# Altium PCB ecen_5730_board4_10-11-2021.PcbDoc
Units mil, origin at the board's own origin, x right, y up, seen from the top; angles counter-clockwise.
Board outline 4100 x 2575 mil, 4 copper layers (Top Layer, Int1 (GND), Int2 (PWR), Bottom Layer), stack 43.712 mil thick; 40 components, 39 nets, 137 pads, 31 vias.
Unrouted connection lines stored in the file: 1.
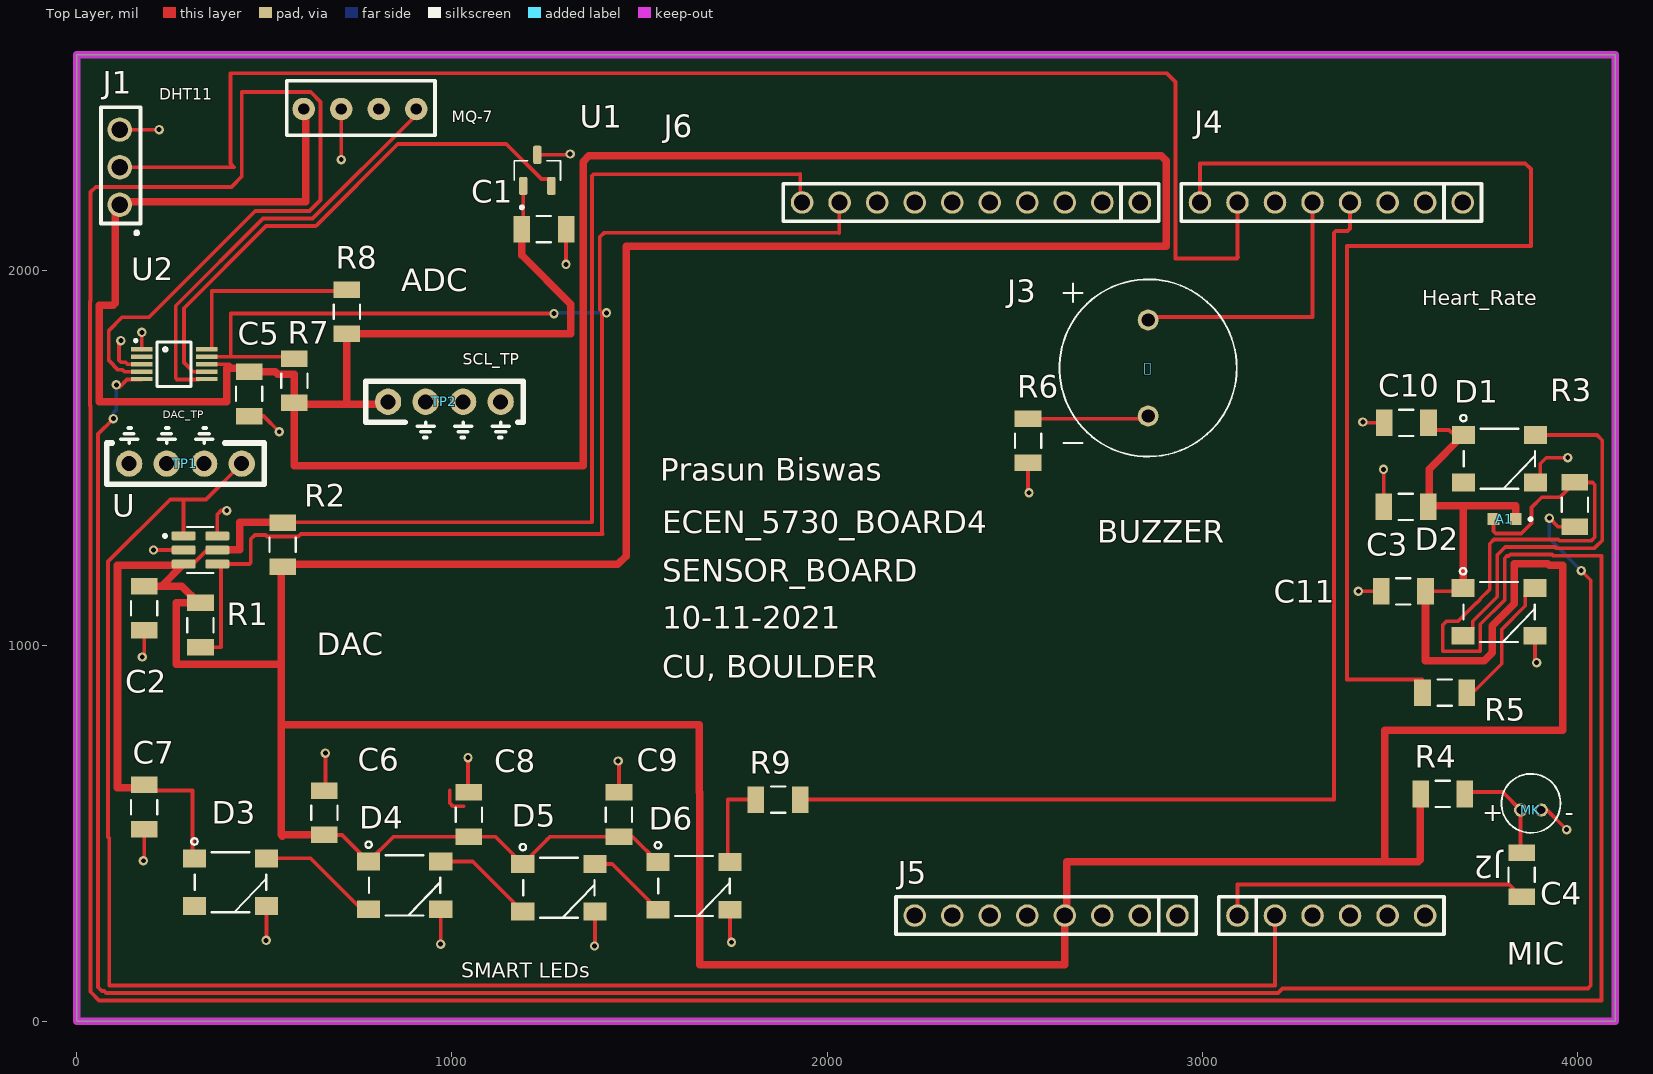
[diagram p0: Top Layer view]
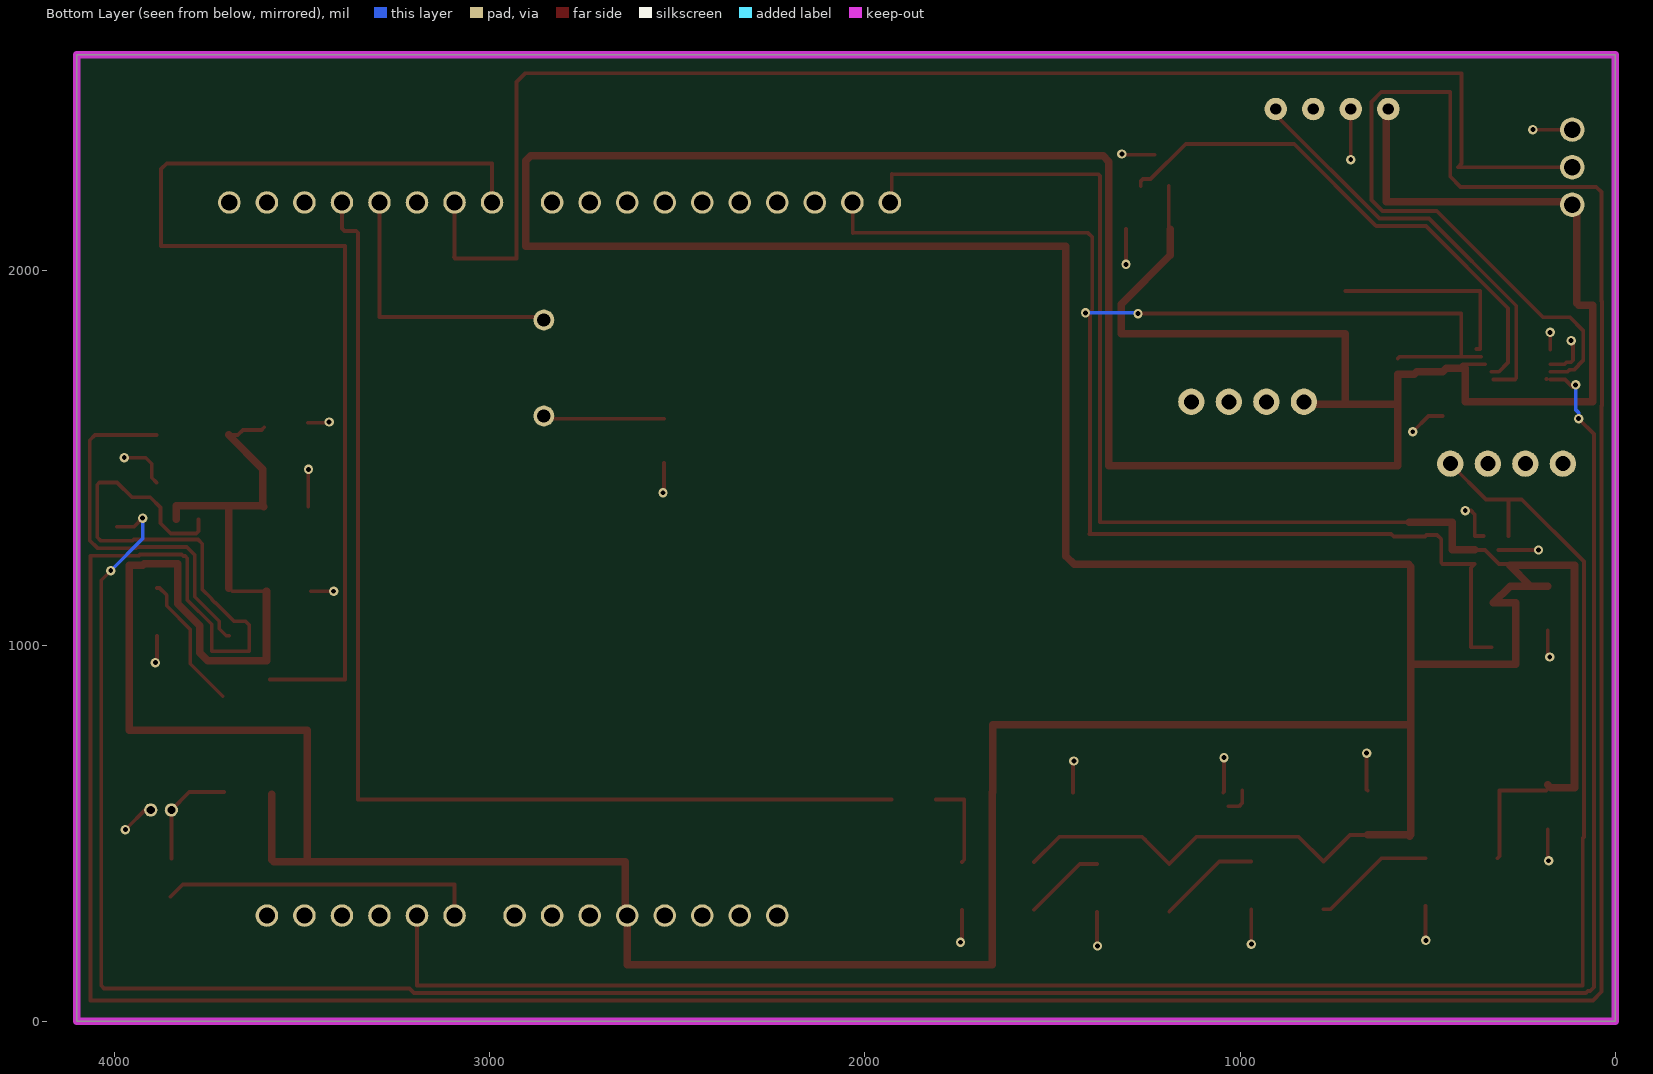
[diagram p1: Bottom Layer view, seen from below]
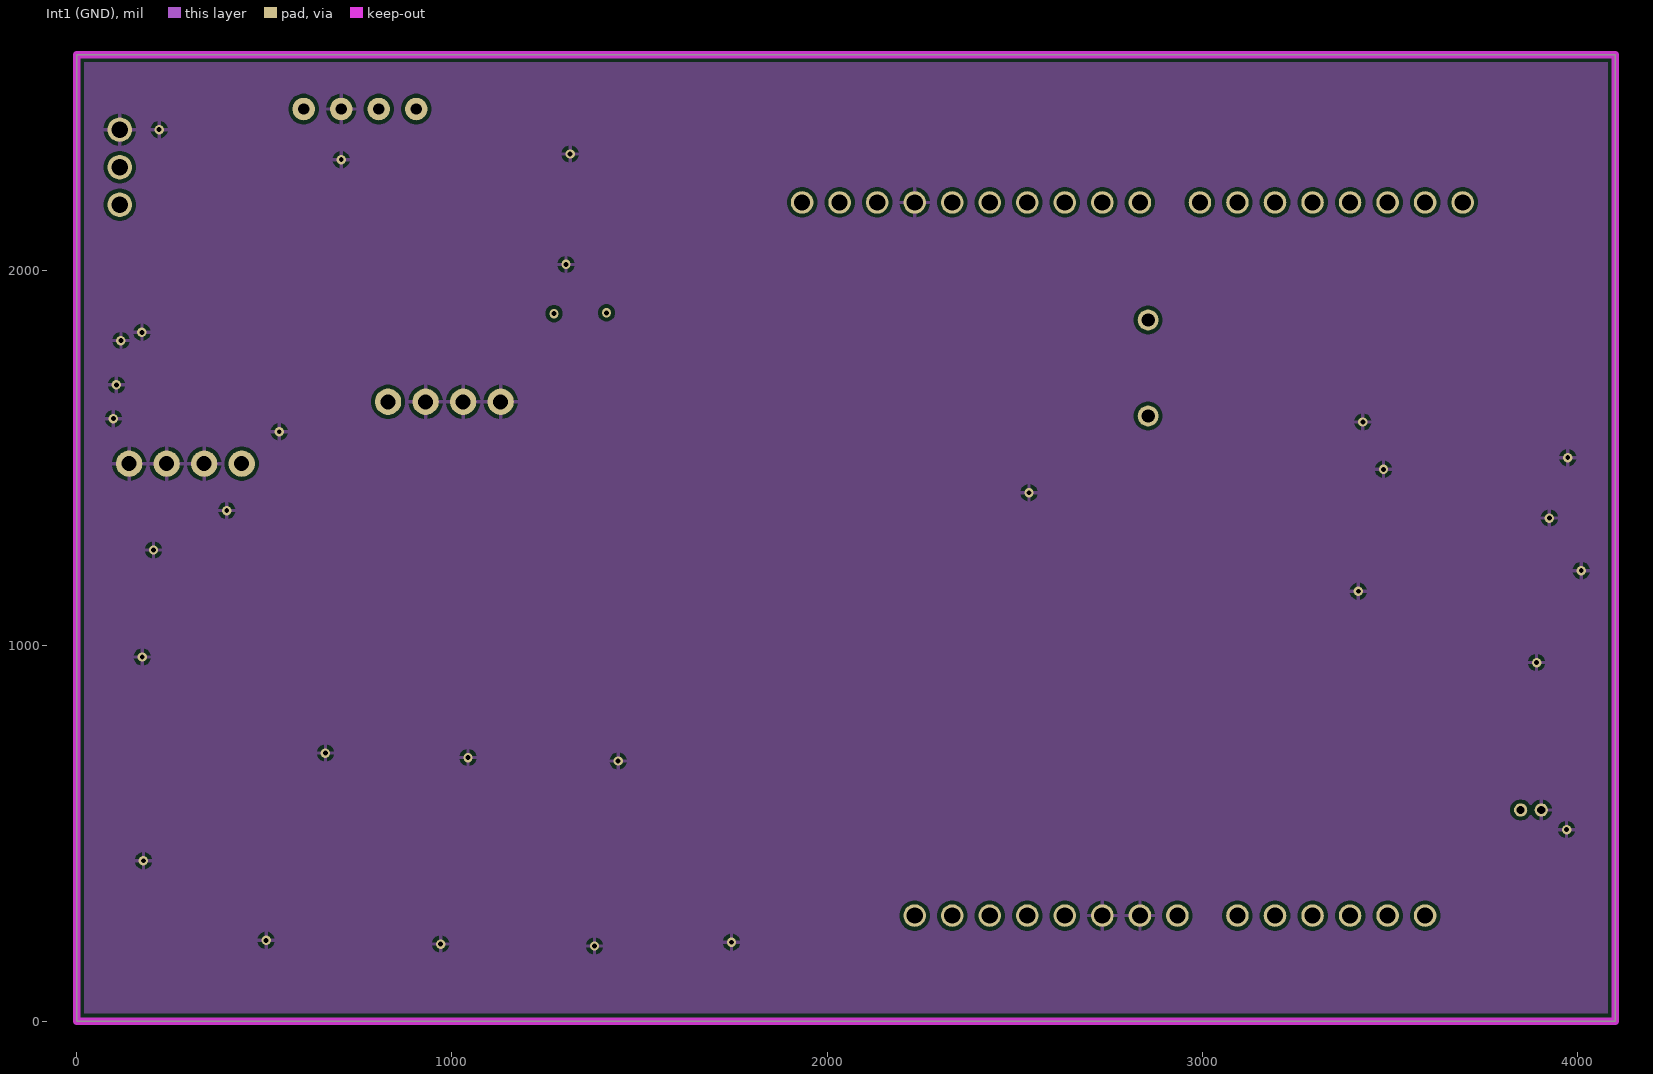
[diagram p2: Int1 (GND)]
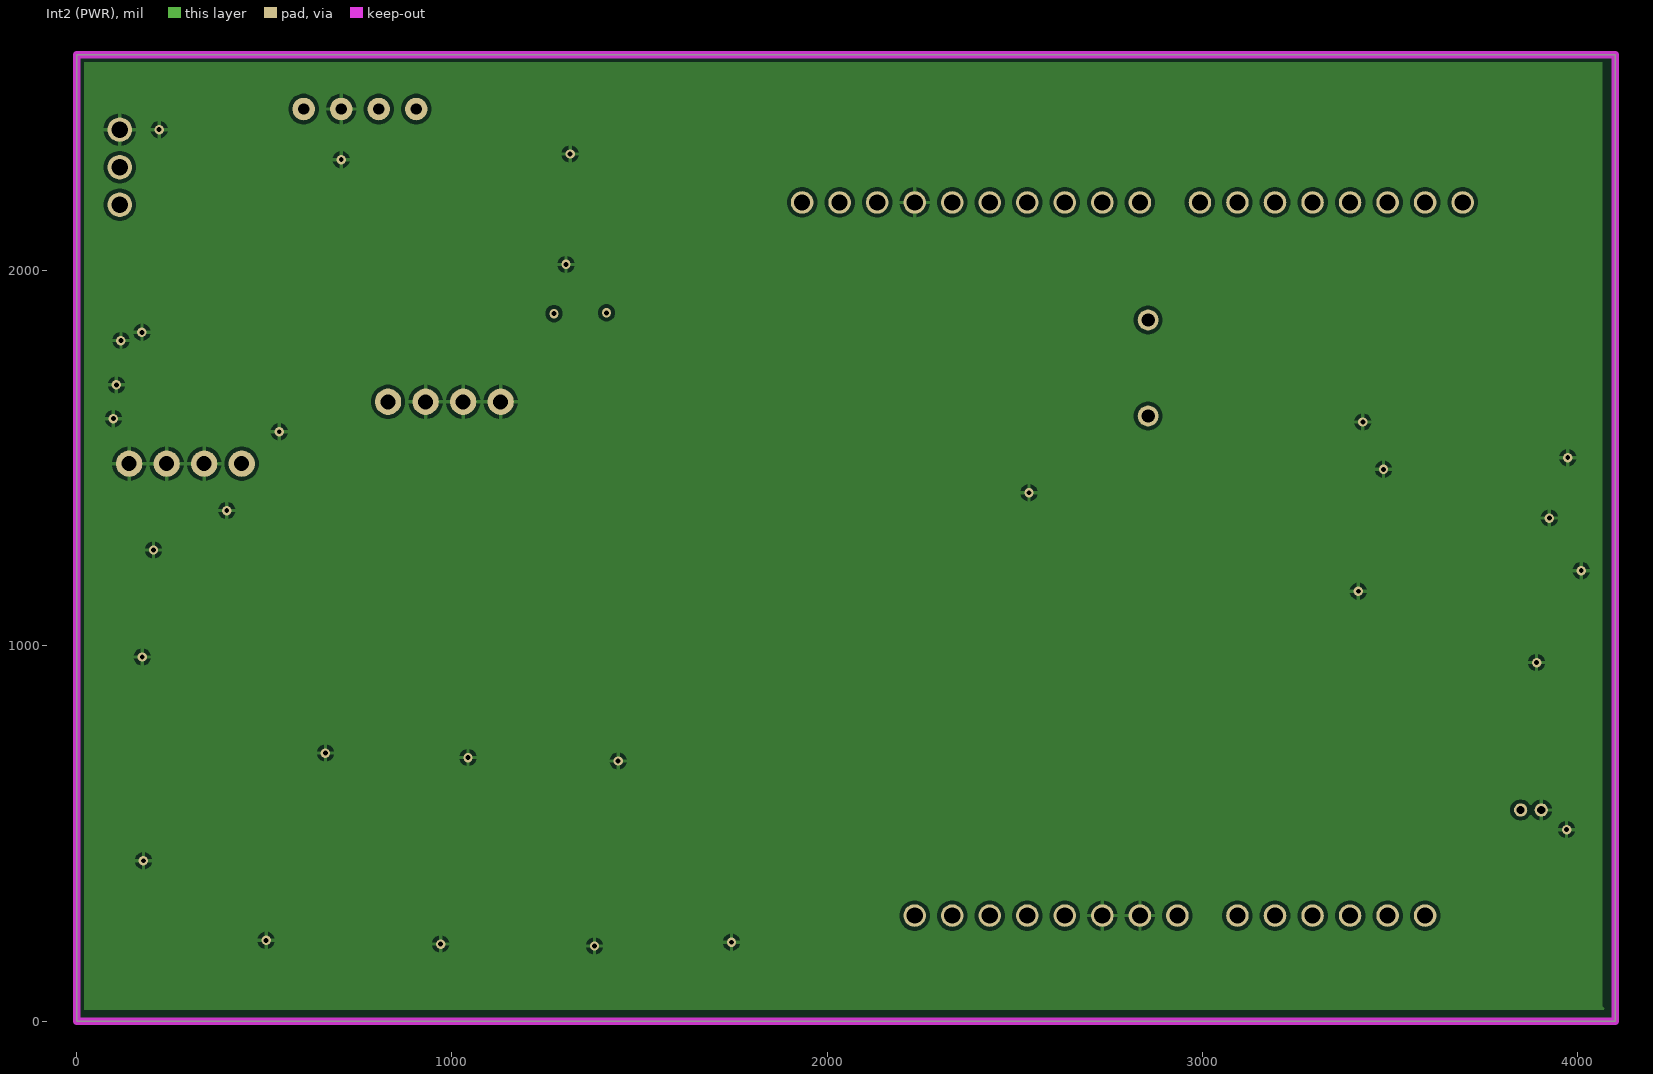
[diagram p3: Int2 (PWR)]
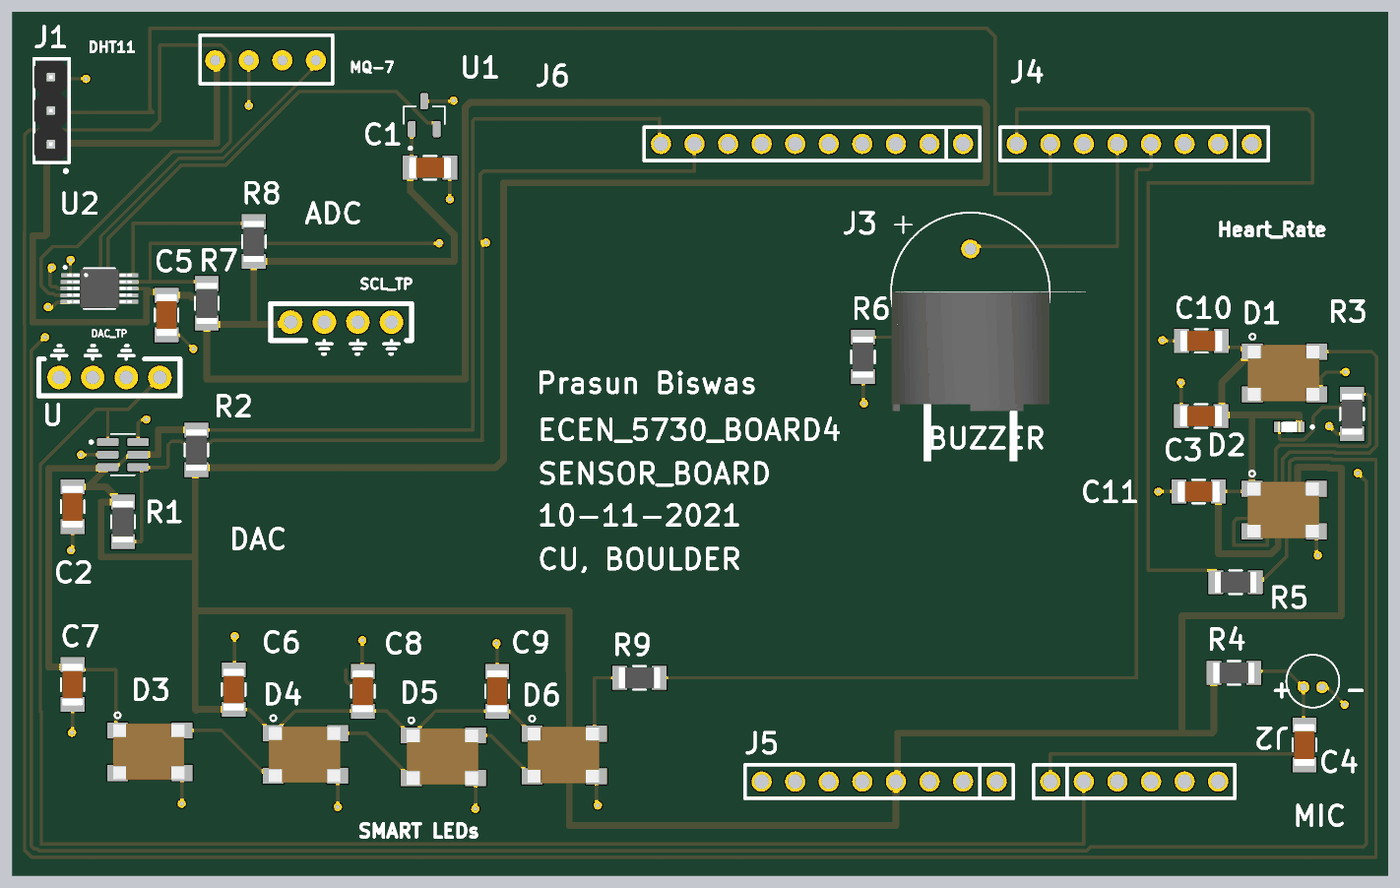
[diagram p4: 3D render of the assembled board from above, using the file's embedded part models]

## Layer stack, top to bottom
Top Solder: solder mask 1, SM-001, Dk 4
Top Layer: signal copper 1.378
Dielectric 2: prepreg 5.1, PP-017, Dk 4.3
Int1 (GND): signal copper 1.378
Dielectric 3: core 28, Core-039, Dk 4.8
Int2 (PWR): signal copper 1.378
Dielectric 4: prepreg 5.1, PP-017, Dk 4.3
Bottom Layer: signal copper 1.378
Bottom Solder: solder mask 1, SM-001, Dk 4

## Board outline
0,0 4100,0 4100,2575 0,2575

## Design rules (kind name [scope] priority, off if disabled: settings)
Clearance [All] p1: gap=10 ignorepadtopadclearanceinfootprint=FALSE except(0: Arc-Hole Track-Hole SMDPad-Hole THPad-Hole Via-Hole Fill-Hole Poly-Hole Region-Hole Text-Hole)
PolygonConnect [All] p1: connectstyle=Relief reliefconductorwidth=10 reliefentries=4 polygonreliefangle="90 Angle" airgapwidth=10
RoutingVias [All] p1: holewidth=13 width=25 viastyle="Through Hole" minholewidth=13 minwidth=25 maxholewidth=13 maxwidth=50
SolderMaskExpansion [All] p1: expansion=4 istentingtop=FALSE
Width "Schematic Width Constraint_1" [InNet('GND')] p1: maxlimit=100 minlimit=10 preferedwidth=20 midlayer1_maxwidth=10 midlayer1_prefwidth=10 midlayer2_maxwidth=10 midlayer2_prefwidth=10 minimp=50.000000 maximp=50.000000 favimp=50.000000
Width "Schematic Width Constraint" [InNet('5V')] p2: maxlimit=100 minlimit=10 preferedwidth=20 midlayer1_maxwidth=10 midlayer1_prefwidth=10 midlayer2_maxwidth=10 midlayer2_prefwidth=10 minimp=50.000000 maximp=50.000000 favimp=50.000000
Width [InNet('5V')] p3: maxlimit=30 minlimit=10 preferedwidth=20 midlayer1_maxwidth=10 midlayer1_prefwidth=10 midlayer2_maxwidth=10 midlayer2_prefwidth=10 minimp=50.000000 maximp=50.000000 favimp=50.000000
30 further rules are at their usual default settings.

## Components (designator, comment, footprint, x,y, rotation, side; value= is the part's Value field where it differs from the comment)
 "AT-1224-TWT-5V-2-R" XDCR_AT-1224-TWT-5V-2-R 2855,1740 r0 top
A1 "ALS-PT19-315C/L177/TR8" XDCR_ALS-PT19-315C/L177/TR8 3805,1337.24 r180 top
C1 "22uF" 1206_Passive_Capacitor 1245,2110 r0 top
C2 "22uF" 1206_Passive_Capacitor 180,1100 r270 top
C3 "22uF" 1206_Passive_Capacitor 3542,1370 r0 top
C4 "1uF" 1206_Passive_Capacitor 3850,390 r270 top
C5 "22uF" 1206_Passive_Capacitor 460,1671 r270 top
C6 "22uF" 1206_Passive_Capacitor 660,555 r90 top
C7 "22uF" 1206_Passive_Capacitor 180,570 r270 top
C8 "22uF" 1206_Passive_Capacitor 1045,550 r90 top
C9 "22uF" 1206_Passive_Capacitor 1445,550 r90 top
C10 "22uF" 1206_Passive_Capacitor 3543,1594 r0 top
C11 "22uF" 1206_Passive_Capacitor 3535,1145 r0 top
D1 "IN-PI55QATPRPGPBPW" SERIAL_LED 3791,1498 r0 top
D2 "IN-PI55QATPRPGPBPW" SERIAL_LED 3790,1090 r0 top
D3 "IN-PI55QATPRPGPBPW" SERIAL_LED 410,370 r0 top
D4 "IN-PI55QATPRPGPBPW" SERIAL_LED 874,361.5 r0 top
D5 "IN-PI55QATPRPGPBPW" SERIAL_LED 1285,355 r0 top
D6 "IN-PI55QATPRPGPBPW" SERIAL_LED 1645,360 r0 top
J1 "3 PIN" 3_PIN_100mil 115,2175 r90 top
J2 "MALE" 6_PIN_100MIL 3093,281 r0 top
J3 "MALE 10PIN" 10_PIN_100MIL 2833,2181 r180 top value=MALE
J4 "MALE 8PIN" 8_PIN_100MIL 3693,2181 r180 top value=MALE
J5 "MALE 8PIN" 8_PIN_100MIL 2933,281 r180 top value=MALE
J6 "4-pin header" 4pinheader 755,2430 r90 top
MK "CMEJ-0415-42-P" MIC_CMEJ-0415-42-P 3875,580 r0 top
R1 "1k" 1206_Passive_Resitor 330,1055 r270 top value="1K Ohm"
R2 "1k" 1206_Passive_Resitor 549,1269 r90 top value="1K Ohm"
R3 "10k" 1206_Passive_Resitor 3992,1376 r90 top value=10KOhm
R4 "1k" 1206_Passive_Resitor 3640,605 r180 top value="1K Ohm"
R5 "1k" 1206_Passive_Resitor 3645,875 r180 top value="1K Ohm"
R6 "1k" 1206_Passive_Resitor 2535,1546 r270 top value="1K Ohm"
R7 "1k" 1206_Passive_Resitor 580,1706 r270 top value="1K Ohm"
R8 "1k" 1206_Passive_Resitor 720,1890 r270 top value="1K Ohm"
R9 "1k" 1206_Passive_Resitor 1869,590 r0 top value="1K Ohm"
TP1 "10x Probe TP" TP10x_Probe 290,1485 r180 top
TP2 "10x Probe TP" TP10x_Probe 980,1650 r0 top
U "MCP4725A0T-E/CH" SOT95P270X145-6N 330,1255.08 r0 top
U1 "DRV5053RAQDBZT" SOT95P237X112-3N 1227.6,2266.54 r90 top
U2 "ADS1115IDGSR" ADC_ADS1115IDGSR 260,1750 r0 top

## Footprints (in the part's own frame and the unit in brackets; to place one, negate y for a bottom-side part, rotate by r counter-clockwise, add the part's x,y. Pads: shape width x height; smd on the part's side, far side on the other; paste and mask are expansions set on the pad)
3_PIN_100mil [mm]
  round 1.65 hole 1.1: 1(0,0) 2(2.54,0) 3(5.08,0)
  silkscreen extent -2,-1.4 6.6,1.27, body extent -1.14,-1.27 6.48,1.27, height 8.38
4pinheader [mil]
  round 60 hole 30: 1(0,150) 1(0,150) 2(0,50) 3(0,-50) 4(0,-150)
  silkscreen extent -70,-200 75,195
6_PIN_100MIL [mil]
  round 60 hole 43.31: 1(0,0) 2(100,0) 3(200,0) 4(300,0) 5(400,0) 6(500,0)
  silkscreen extent -50,-50 550,50
8_PIN_100MIL [mil]
  round 60 hole 43.31: 1(0,0) 2(100,0) 3(200,0) 4(300,0) 5(400,0) 6(500,0) 7(600,0) 8(700,0)
  silkscreen extent -50,-50 750,50
10_PIN_100MIL [mil]
  round 60 hole 43.31: 1(0,0) 2(100,0) 3(200,0) 4(300,0) 5(400,0) 6(500,0) 7(600,0) 8(700,0) 9(800,0) 10(900,0)
  silkscreen extent -50,-50 950,50
1206_Passive_Capacitor [mil]
  rect 44x71 smd: 1(-59,0) 2(59,0)
  silkscreen extent -19,-35 19,35, body extent -63,-31 63,32, height 50
1206_Passive_Resitor [mil]
  rect 44x71 smd: 1(-59,0) 2(59,0)
  silkscreen extent -19,-35 19,35, body extent -61,-31 61,31, height 26
ADC_ADS1115IDGSR [mm] "*SOP50P490X110-10N"
  rect 1.45x0.3 smd mask+0.025: 1(-2.2,1)
  rect 1.47x0.3 smd mask+0.025: 2(-2.2,0.5) 3(-2.2,0) 4(-2.2,-0.5) 5(-2.2,-1) 6(2.2,-1) 7(2.2,-0.5) 8(2.2,0) 9(2.2,0.5) 10(2.2,1)
  silkscreen extent -2.68,-1.5 1.15,1.68, body extent -2.44,-1.49 2.46,1.51, height 1.1
MIC_CMEJ-0415-42-P [mm]
  round 0.9 hole 0.55: N(0.7,-0.45) P(-0.7,-0.45)
  silkscreen extent -2,-2 2,2
SERIAL_LED [mil] "Footprint for serial LED"
  rect 62x47.5 smd: 1(-96,63.5) 2(-96,-63.5) 3(96,-63.5) 4(96,63.5)
  silkscreen extent -105,-80 95,117, body extent -109,-84 103,84, height 63
SOT95P237X112-3N [mm]
  rrect50% 1.24x0.59 smd: 1(-1.055,0.95) 2(-1.055,-0.95) 3(1.055,0)
  silkscreen extent -2.6,-1.56 0.65,1.56
SOT95P270X145-6N [mm]
  rrect25% 1.61x0.59 smd: 1(-1.145,0.95) 2(-1.145,0) 3(-1.145,-0.95) 4(1.145,-0.95) 5(1.145,0) 6(1.145,0.95)
  silkscreen extent -2.5,-1.56 0.9,1.56
TP10x_Probe [mil] "Small Probs footprint"
  round 70 hole 40: 1(-150,0) 2(-50,0) 2(50,0) 2(150,0)
  silkscreen extent -210,-95 210,55
XDCR_ALS-PT19-315C/L177/TR8 [mm]
  rect 0.8x0.8 smd: 1(-0.75,0) 2(0.75,0)
  silkscreen extent -1.85,-0.1 -1.65,0.1, body extent -0.85,-0.4 0.85,0.4, height 0.6
XDCR_AT-1224-TWT-5V-2-R [mm]
  round 1.408 hole 0.9: N(0,-3.25) P(0,3.25)
  silkscreen extent -6,-6 6,6, body extent -6,-12.8 8.75,0.05, height 6

## Part data
: "AUDIO TRANSDUCER 5 VP-P 87 DB 2400 HZ", Package="PUI Audio,", Availability="In Stock", Check_prices=https://www.snapeda.com/parts/AT-1224-TWT-5V-2-R/PUI%20Audio,%20Inc./view-part/453710/?ref=eda, MF="PUI Audio,", MP=AT-1224-TWT-5V-2-R, Price=None, Purchase-URL=https://pricing.snapeda.com/search/part/AT-1224-TWT-5V-2-R/?ref=eda, SnapEDA_Link=https://www.snapeda.com/parts/AT-1224-TWT-5V-2-R/PUI%20Audio,%20Inc./view-part/453710/?ref=snap
A1: "Phototransistors 630nm 2-SMD, No Lead", Package=None, Availability=Good, Check_prices=https://www.snapeda.com/parts/ALS-PT19-315C/L177/TR8/Everlight%20Electronics%20Co%20Ltd/view-part/226235/?ref=eda, MF=Everlight, MP=ALS-PT19-315C/L177/TR8, Price=None, Purchase-URL=https://pricing.snapeda.com/search/part/ALS-PT19-315C/L177/TR8/?ref=eda, SnapEDA_Link=https://www.snapeda.com/parts/ALS-PT19-315C/L177/TR8/Everlight%20Electronics%20Co%20Ltd/view-part/226235/?ref=snap
C1 C2 C3 C5 C6 C7 C8 C9 C10 C11: library part C_22uF_1206, "22uF ±10% 25V X5R 1206 Multilayer Ceramic Capacitors MLCC - SMD/SMT RoHS", LCSC Part#=C12891, MFR Part #=CL31A226KAHNNNE, Datasheet=https://datasheet.lcsc.com/lcsc/1811031514_Samsung-Electro-Mechanics-CL31A226KAHNNNE_C12891.pdf, Type=Extended
C4: library part C_1uF_1206, "MULTILAYER CERAMIC CAPACITORS MLCC - SMD/SMT 1UF 50V 1206 ROHS", LCSC Part#=C1848, MFR Part #=CL31B105KBHNNNE, Digikey Link=https://www.digikey.com/product-detail/en/C1206C105M4RACTU/399-8150-1-ND/3471873/?itemSeq=304982366, Digikey Part=399-8150-1-ND, Type=Basic
D1 D2 D3 D4 D5 D6: library part LED_Smart_5050, "Digital Series Cascade LED", DigiKey=https://www.digikey.com/product-detail/en/inolux/IN-PI55QATPRPGPBPW-60/1830-1209-1-ND/9681289
J1: library part J_3_PIN_HEADER, "3 2.54mm Straight 1 Header，Breakaway Through Hole Pin Header & Female Header ROHS", LCSC Part#=C49257, Datasheet=https://datasheet.lcsc.com/lcsc/1811132313_BOOMELE-Boom-Precision-Elec-C49257_C49257.pdf, MFR Part #=C49257, Type=Extended
J2: library part JF_6_PIN_MALE, "Male header- 6 pin 1 row- through Hole", LCSC Part#=C37208, Datasheet=https://datasheet.lcsc.com/szlcsc/1810312320_BOOMELE-Boom-Precision-Elec-C37208_C37208.pdf, Type=Extended
J3: library part JF_10_PIN_MALE, "Pin Header 10 1 right-angle，180degrees 2.54mm Through Hole,P=2.54mm Pin Header & Female Header RoHS", LCSC Part#=C124372, Datasheet=https://datasheet.lcsc.com/szlcsc/1810241611_Ckmtw-Shenzhen-Cankemeng-C124372_C124372.pdf, Type=Extended
J4 J5: library part JF_8_PIN_MALE, "Pin Header 8 1 right-angle，180degrees 2.54mm Through Hole,P=2.54mm Pin Header & Female Header RoHS", LCSC Part#=C492407, Datasheet=https://datasheet.lcsc.com/szlcsc/2003191006_XFCN-PZ254V-11-08P_C492407.pdf, Type=Extended
J6: library part J
MK: "4.0 Ð¼Ð¼, Ð²ÑÐµÐ½Ð°Ð¿Ñ€Ð°Ð²Ð»ÐµÐ½Ð½Ñ‹Ð¹, Ð¼Ð¾Ð½Ñ‚Ð°Ð¶ Ð½Ð° Ð¿ÐµÑ‡Ð°Ñ‚Ð½Ð¾Ð¹ Ð¿Ð»Ð°Ñ‚Ðµ, 2.0 Ð’ Ð¿Ð¾ÑÑ‚Ð¾ÑÐ½Ð½Ð¾Ð³Ð¾ Ñ‚Ð¾ÐºÐ°, Ð­Ð»ÐµÐºÑ€ÐµÑ‚-ÐºÐ¾Ð½Ð´ÐµÐ½ÑÐ°Ñ‚Ð¾Ñ€Ð½Ñ‹Ð¹ Ð¼Ð¸ÐºÑ€Ð¾Ñ„Ð¾Ð½", Package="CUI Inc.", CUI_purchase_URL=https://www.cuidevices.com/product/audio/microphones/electret-condenser-microphones/cmej-0415-42-p?utm_source=snapeda.com&utm_medium=referral&utm_campaign=snapedaBOM, Digi-Key_Part_Number=102-6542-ND, Digi-Key_Purchase_URL=https://www.digikey.com/product-detail/en/cui-devices/CMEJ-0415-42-P/102-6542-ND/10253451?utm_source=snapeda&utm_medium=aggregator&utm_campaign=symbol, MF="CUI Devices", MP=CMEJ-0415-42-P, SnapEDA_Link=https://www.snapeda.com/parts/CMEJ-0415-42-P/CUI%20Devices/view-part/3625885/?ref=snap
R1 R2 R4 R5 R6 R7 R8 R9: library part R_1K_1206, "CHIP RESISTOR - SURFACE MOUNT 1KOHMS ±1% 1/4W 1206 ROHS", LCSC Part#=C4410, MFR Part #=1206W4F1001T5, Digikey Link=https://www.digikey.com/product-detail/en/RNCP1206FTD1K00/RNCP1206FTD1K00CT-ND/2240675/?itemSeq=304982373, Digikey Part=RNCP1206FTD1K00CT-ND, Type=Basic
R3: library part R_10KOhm_1206, "10 kOhms ±5% 0.25W, 1/4W Chip Resistor 1206 (3216 Metric) Automotive AEC-Q200 Thick Film", LCSC Part#=C17902, Digikey Link=https://www.digikey.com/product-detail/en/RMCF1206JT300R/RMCF1206JT300RCT-ND/1942776/?itemSeq=304982374, Digikey Part=RMCF1206JT300RCT-ND, Type=Basic
TP1 TP2: library part TP_10x_Probe, "Test Point 300 mil centers"
U: "12 Bit Digital to Analog Converter 1 SOT-23-6", Package="SOT-23-6 Microchip", Availability=Unavailable, MF=Microchip, MP=MCP4725A0T-E/CH, Price=None, SnapEDA_Link=https://www.snapeda.com/parts/MCP4725A0T-E/CH/Microchip/view-part/109888/?ref=snap
U1: "SENSOR LINEAR ANALOG SOT23-3", Package=None, Availability=Unavailable, MP=DRV5053RAQDBZT, Price=None
U2: library part U_ADC_ADS1115IDGSR, "16-Bit ADC with Integrated MUX, PGA, Comparator, Oscillator, and Reference 10-VSSOP -40 to 125", LCSC Part#=C37593, Package="MSOP-10 Texas Instruments", Digi-Key_Purchase_URL=https://www.digikey.com/product-detail/en/texas-instruments/ADS1115IDGSR/296-38849-1-ND/5142969?utm_source=snapeda&utm_medium=aggregator&utm_campaign=symbol, MFR Part #=ADS1115IDGSR, SnapEDA_Link=https://www.snapeda.com/parts/ADS1115IDGSR/Texas%20Instruments/view-part/?ref=snap, Type=Extended

## Via types
v1: diameter 25, hole 13, Top Layer to Bottom Layer, 31 vias

## Nets (pads, with @x,y where several pads share a name; then routed paths per layer and width w, separated by ;. In a path a pad name is that pad's centre, name@x,y a point inside that pad or via, vN(x,y) a via of type N, cw(c..) or ccw(c..) an arc to the next point about the centre after c; other vN are vias at no path point)
3.3V: J5.5
5V: A1.1 C1.1 C2.1 C3.2 C5.1 C6.1 C7.1 C8.1 C9.1 C10.2 C11.2 D1.1 D2.1 D3.1 D4.1 D5.1 D6.1 J1.1 J3.10 J5.4 J6.1 R1.1 R2.1 R2.2 R4.2 R7.2 R8.2 TP2.1 U1.1 U2.8 U.3 U.5 | length 23943.7
  Top Layer w10: 98,1907 103,1912 ; C7.1@185,614 308.5,614 308.5,439 D3.1 ; U.3@281.24,1214 U.3 310.34,1217.68 347.66,1255 360,1255 360.08,1255.08 U.5 ; U2.8 349.4,1750 349.72,1749.69 405,1749.69 ; R2.1@545,1211 R2.1@550.53,1216.53 ; R2.2@549,1329 1373,1329 1373,2251.78 1377.11,2255.89 1926.89,2255.89 1928,2257 1928,2186 J3.10 ; R7.2 R7.2@583.5,1643.5 ; C6.1 707,496 D4.1 844,491 C8.1 1116.5,491 D5.1 1252,481.5 1252,482 1261,491 C9.1 1481.5,491 D6.1 ; TP2.1@823.5,1643.5 TP2.1 ; 994.5,614 994.5,580.79 1003.29,572 1030.86,572 ; C1.1 1190.2,2114.2 U1.1 ; 1659,609 1660,610 ; 3575,425 3580,430 ; R4.2@3580,604 R4.2 ; C11.2 3685.5,1145 D2.1 ; C10.2@3600,1582 3607,1575 3657,1575 3670.5,1561.5 D1.1
  Top Layer w20: 98,1907 61,1907 61,1650 400,1650 400,1739 ; 103,1912 103,2163 J1.1 123,2183 610,2183 610,2425 J6.1@605,2430 ; C7.1 172.92,621.92 109,621.92 109,1214 281.24,1214 226.24,1159 ; C2.1 226.24,1159 ; U.5 435,1255.08 435,1329 R2.2@549,1329 ; 405,1744 400,1739 ; R2.1@545,1211 545,950 ; R2.1@550.53,1216.53 1441.53,1216.53 1464,1239 1464,2065 2903,2065 2903,2292 2890,2305 1365,2305 1350,2290 1350,1480 580,1480 R7.2 580,1723 536.22,1723 529.22,1730 C5.1 451,1739 400,1739 ; R7.2@583.5,1643.5 720,1643.5 ; C6.1 551,496 548,493 545,496 545,790 ; TP2.1@823.5,1643.5 720,1643.5 ; C1.1 1186,2041 1317,1910 1317,1831 R8.2 720,1643.5 ; 1659,609 1659,790 545,790 ; 1660,610 1660,150 2633,150 J5.4 2638,286 2638,425 3485,425 ; 3575,425 3485,425 ; 3580,430 R4.2@3580,604 ; C11.2 3594,960 3750.36,960 3772,981.64 3772,1053.72 3830,1111.72 3830,1218 3920.36,1218 3923.36,1215 3960,1215 3960,775 3485,775 3485,425 ; C3.2 C3.2@3603.99,1372.99 ; D2.1 3694,1372.99 ; D1.1 3603.99,1470.49 C3.2@3603.99,1372.99 ; A1.1 3834.53,1372.99 3694,1372.99 ; 226.24,1159 280,1159 325,1114 265,1114 265,950 545,950 ; 545,790 545,950 ; C3.2@3603.99,1372.99 3694,1372.99
A0: C4.2 J2.1 | length 853.7
  Top Layer w10: J2.1 3093,364 3817,364 C4.2
A1: J2.2 TP1.1 U.1 | length 4984
  Top Layer w10: U.1 284.92,1389.92 ; TP1.1 344.92,1389.92 284.92,1389.92 ; J2.2 3193,95 87,95 87,487.64 84,490.64 84,1224.36 249.57,1389.92 284.92,1389.92
A2: J2.3
A3: J2.4
A4: J2.5
A5: J2.6
ADC_A2: A1.2 R3.2 U2.4 | length 11179.7
  Top Layer w10: U2.4@173.39,1730 127.57,1730 122.57,1735 110.57,1735 86,1759.57 86,1840.14 120.86,1875 193,1875 476,2158 620.36,2158 650,2187.64 650,2448.64 623.64,2475 440,2475 440,2250 412.48,2222.48 50.86,2222.48 37,2208.62 37,1918.36 36,1917.36 36,1639.64 37,1638.64 37,78 60,55 4063,55 4063,1240 3933.72,1240 3930.72,1243 3819.64,1243 3815.64,1239 3810.86,1239 3805,1233.14 3805,1122.07 3740,1057.07 3740,985 3640,985 3640,1055 3650,1065 3659.75,1065 3660,1065.25 3680.5,1065.25 3730,1114.75 3731.21,1114.75 3740,1123.54 3740,1125 3765,1150 3765,1271.43 3776.57,1283 3947.29,1283 3950.29,1280 4036.14,1280 4045,1288.86 4045,1429 4039,1435 R3.2 3952.75,1395.75 3903.89,1395.75 3876.45,1368.3 3876.45,1326.45 3849,1299 3781.33,1299 3775.47,1304.86 A1.2
ADC_A4: J6.4 U2.6 | length 1122.4
  Top Layer w10: U2.6@325,1709.41 267.59,1709.41 264,1713 264,1905.57 496.43,2138 628.64,2138 895.43,2404.79 895.43,2420.43 J6.4
ADC_A5: U1.2 U2.7 | length 1412.6
  Top Layer w10: U2.7@330,1730 310.56,1730 286,1754.56 286,1899.28 504.72,2118 636.92,2118 638.92,2120 855.92,2337 1144.85,2337 1238.39,2243.46 1258.45,2243.46 1265,2236.91 U1.2
D0: J4.1
D1: J4.2
D2: J4.3
D5: J4.6
D8: J3.1
D9: J3.2
D10: J3.3
D11: J3.4
D12: J3.5
D13: J3.6
DHT11: J1.2 J4.7 | length 3871.7
  Top Layer w10: J1.2 420,2275 410,2285 410,2525 2905,2525 2928,2502 2928,2032 3092,2032 3095,2035 3093,2037 J4.7
GND: C1.2 C2.2 C3.1 C5.2 C6.2 C7.2 C8.2 C9.2 C10.1 C11.1 D1.3 D2.3 D3.3 D4.3 D5.3 D6.3 J1.3 J3.7 J5.2 J5.3 J6.2 MK.N R3.1 R6.2 TP1.2 TP2.2 U1.3 U2.1 U2.3 U2.5 U.2 U.6 | length 9367.9
  Top Layer w10: v1(98,1605) 57,1564 57,90 67,80 73.72,80 78.72,75 3201.28,75 3213,86.72 4026.72,86.72 4034.37,94.37 4034.37,1174.63 v1(4009,1200) ; v1(106,1695) 106,1691 103.75,1688.75 114.1,1688.75 134.35,1709 U2.5@173,1709 ; J1.3 v1(220,2375) ; v1(118,1813) 113,1808 113,1760.86 118.86,1755 130.85,1755 135.85,1750 U2.3 ; U2.1 v1@173.39,1834.39 ; v1(175,970) 180,975 C2.2 ; v1(178,427) 180,429 C7.2 ; U2.5@182.8,1710.04 U2.5@183.39,1710.63 ; v1(205,1255) 205.08,1255.08 U.2 U.2@312.26,1255.08 ; U.6@350.79,1292.48 U.6 375.08,1350.08 385,1360 v1(400,1360) ; C5.2 498,1612 v1(540,1570) ; D3.3 506,224 v1@510,220 ; C6.2 663,617 v1(663,714) ; v1(705,2295) J6.2 ; v1(970,205) D4.3 ; v1(1043,702) 1043,611 C8.2 ; U1.3 1313.08,2308.08 v1(1315,2310) ; C1.2 v1(1304,2016) v1@1305,2015 ; v1(1380,200) 1381,201 D5.3 ; v1(1443,693) 1445,691 C9.2 ; D6.3 1741,214 v1(1745,210) ; R6.2 2535,1410 v1(2537.5,1407.5) v1@2540,1405 ; v1(3415,1145) C11.1 ; v1(3427,1596) 3429,1594 C10.1 ; v1(3482,1470) 3483,1469 C3.1 ; D2.3 3886,959 v1(3890,955) ; D1.3 3899.78,1447.28 3899.78,1485 3915.78,1501 v1(3973,1501) ; MK.N 3917.72,562.28 v1@3965,515 ; v1(3924,1340) 3947,1317 R3.1
  Bottom Layer w10: v1(98,1605) 98,1621 106,1629 v1(106,1695) ; v1(3924,1340) 3924,1285 v1(4009,1200)
  other v1: 505,215 3970,510 174,1835
Heart_LED: J4.8 R5.2 | length 3042.2
  Top Layer w10: J4.8 2993,2263 2993,2285 3035,2285 3860,2285 3875,2270 3875,2065 3385,2065 3385,910 R5.2@3585,910
IOREF: J5.7
Net_N: .N R6.1 | length 341.2
  Top Layer w10: R6.1 .N@2855,1605 ; .N@2855,1610 .N@2870,1625
NetC4_1: C4.1 MK.P R4.1 | length 289.5
  Top Layer w10: R4.1@3707.43,610 3799.72,610 MK.P C4.1@3847.44,432.56
NetD1_4: D1.4 D2.2 | length 1006.1
  Top Layer w10: D2.2 3701.25,1026.5 3720,1045.25 3720,1065.36 3785,1130.36 3785,1241.43 3806.57,1263 3939,1263 3942,1260 4044.43,1260 4065,1280.57 4065,1547.22 4050.72,1561.5 D1.4
NetD2_4: D2.4 R5.1 | length 364.9
  Top Layer w10: R5.1@3710.55,865.55 3797,952 3797,1043.36 3860,1106.36 3860,1134.75 3878.75,1153.5 D2.4
NetD3_4: D3.4 D4.2 | length 328.1
  Top Layer w10: D3.4 623.5,433.5 759,298 D4.2
NetD4_4: D4.4 D5.2 | length 274.3
  Top Layer w10: D4.4 1055.5,425 D5.2
NetD5_4: D5.4 D6.2 | length 218.5
  Top Layer w10: D5.4 1427,418.5 D6.2
NetD6_4: D6.4 R9.1 | length 244
  Top Layer w10: D6.4 1735,429.5 1735,590 R9.1
NetR8_1: R8.1 U2.10 | length 524.4
  Top Layer w10: U2.10@370,1790.59 360,1790.59 360,1945 R8.1@720,1945
PWM: .P J4.5 | length 728.1
  Top Layer w10: .P@2870,1875.91 3293,1875.91 J4.5
RESET: J5.6
S-LED: J4.4 R9.2 | length 3049.3
  Top Layer w10: R9.2 3350,590 3350,2100.14 3354.86,2105 3386.47,2105 3393,2111.53 3393,2147 J4.4
SDA: J3.9 R1.2 R7.1 U2.9 U.4 | length 4254.3
  Top Layer w10: R1.2 385,996 385,1207.76 U.4 460.68,1217.68 464,1221 464,1284 475,1295 503.29,1295 507.29,1291 590.71,1291 597.71,1298 1401.88,1298 1400,1299.88 1400,1885 v1@1402,1887 ; U2.9@358,1769.69 411,1769.69 ; R7.1 575.32,1769.69 411,1769.69 ; v1(1272,1885) 411,1885 411,1769.69 ; v1(1412,1887) v1@1402,1887 ; J3.9 2032,2180 2032,2099 2031,2100 1405,2100 1394,2089 1394,1895 v1@1402,1887
  Bottom Layer w10: v1(1272,1885) 1275,1888 1276,1887 v1(1412,1887)
Vin: J5.1
pads on no net: D1.2 D3.2 J3.8 J5.8 J6.3 U2.2

## Polygon pours and split planes (outlines as drawn)
GND on Int1 (GND) "GND_L02_P000" (solid, pour order 0): 10,2565 4080,2565 4080,20 10,20 10,2570 15,2575
GND on Int2 (PWR) "GND_L03_P001" (solid, pour order 1): 15,2555 4065,2555 4065,40 4075,30 15,30 15,2545 20,2550

## Keep-outs
Keep-Out Layer:
  the board outline again, w20

## Silkscreen, mask and mechanical layers (free items; w line width, h text height)
Top Overlay:
  text "DHT11" at 220,2455 h30
  text "MQ-7" at 1000,2395 h30
  text "ADC" at 865,1945 h60
  text "Heart_Rate" at 3585,1906.66 h40
  text "SCL_TP" at 1029,1749 h30
  text "DAC_TP" at 229,1606.33 h20
  text "Prasun Biswas" at 1555,1440 h60
  text "ECEN_5730_BOARD4" at 1560,1300 h60
  text "BUZZER" at 2720,1275 h60
  text "SENSOR_BOARD" at 1560,1170 h60
  text "10-11-2021" at 1560,1045 h60
  text "DAC" at 640,975 h60
  text "CU, BOULDER" at 1560,914.99 h60
  text "MIC" at 3810,150 h60
  text "SMART LEDs" at 1025,115 h40

## Text inside footprints (layer, text, board x,y; h text height)
MK: Top Overlay "-" at 3965.55,532.76 h50; Top Overlay "+" at 3745.08,532.76 h50; Mechanical 13 "-" at 3965.55,532.76 h50; Mechanical 13 "+" at 3745.08,532.76 h50